# Altium PCB PCB1 - Original(AutoRoute).PcbDoc
Units mil, origin at the board's own origin, x right, y up, seen from the top; angles counter-clockwise.
Board outline 4505.03 x 3000.03 mil, 2 copper layers (Top Layer, Bottom Layer); 44 components, 54 nets, 176 pads, 23 vias.
Unrouted connection lines stored in the file: 2.
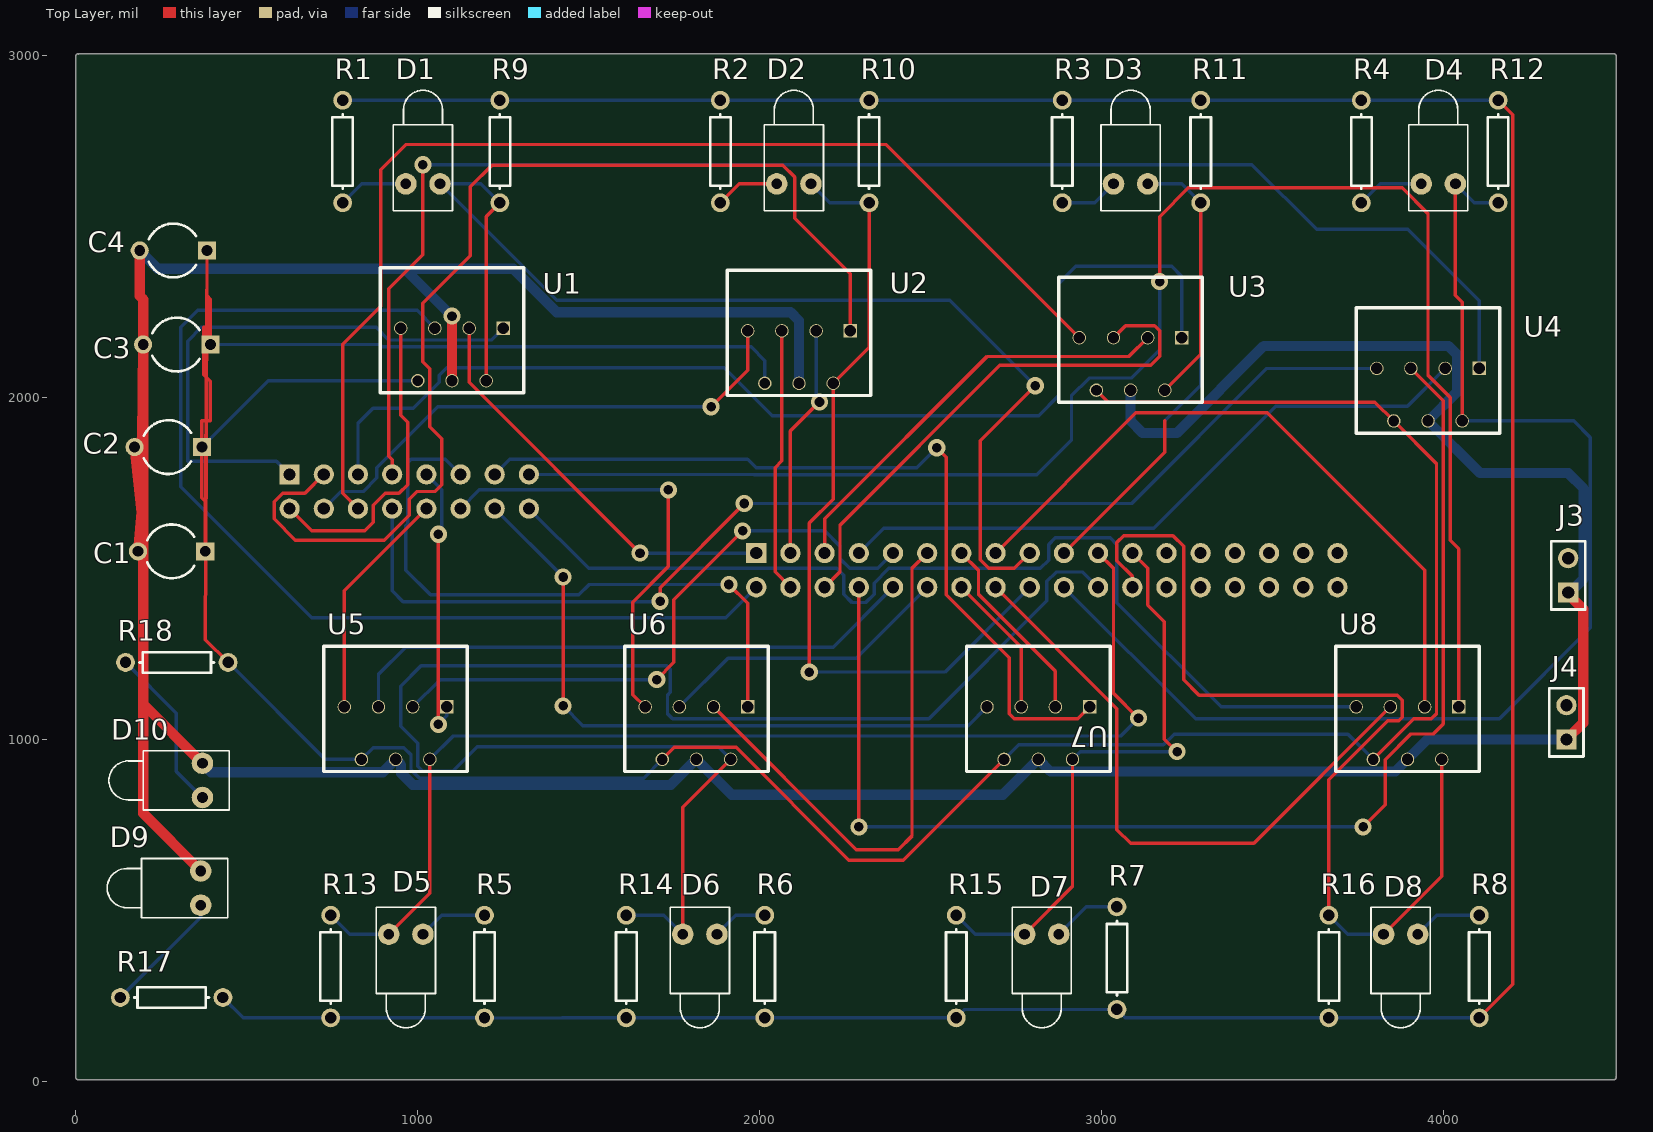
[diagram p0: Top Layer view]
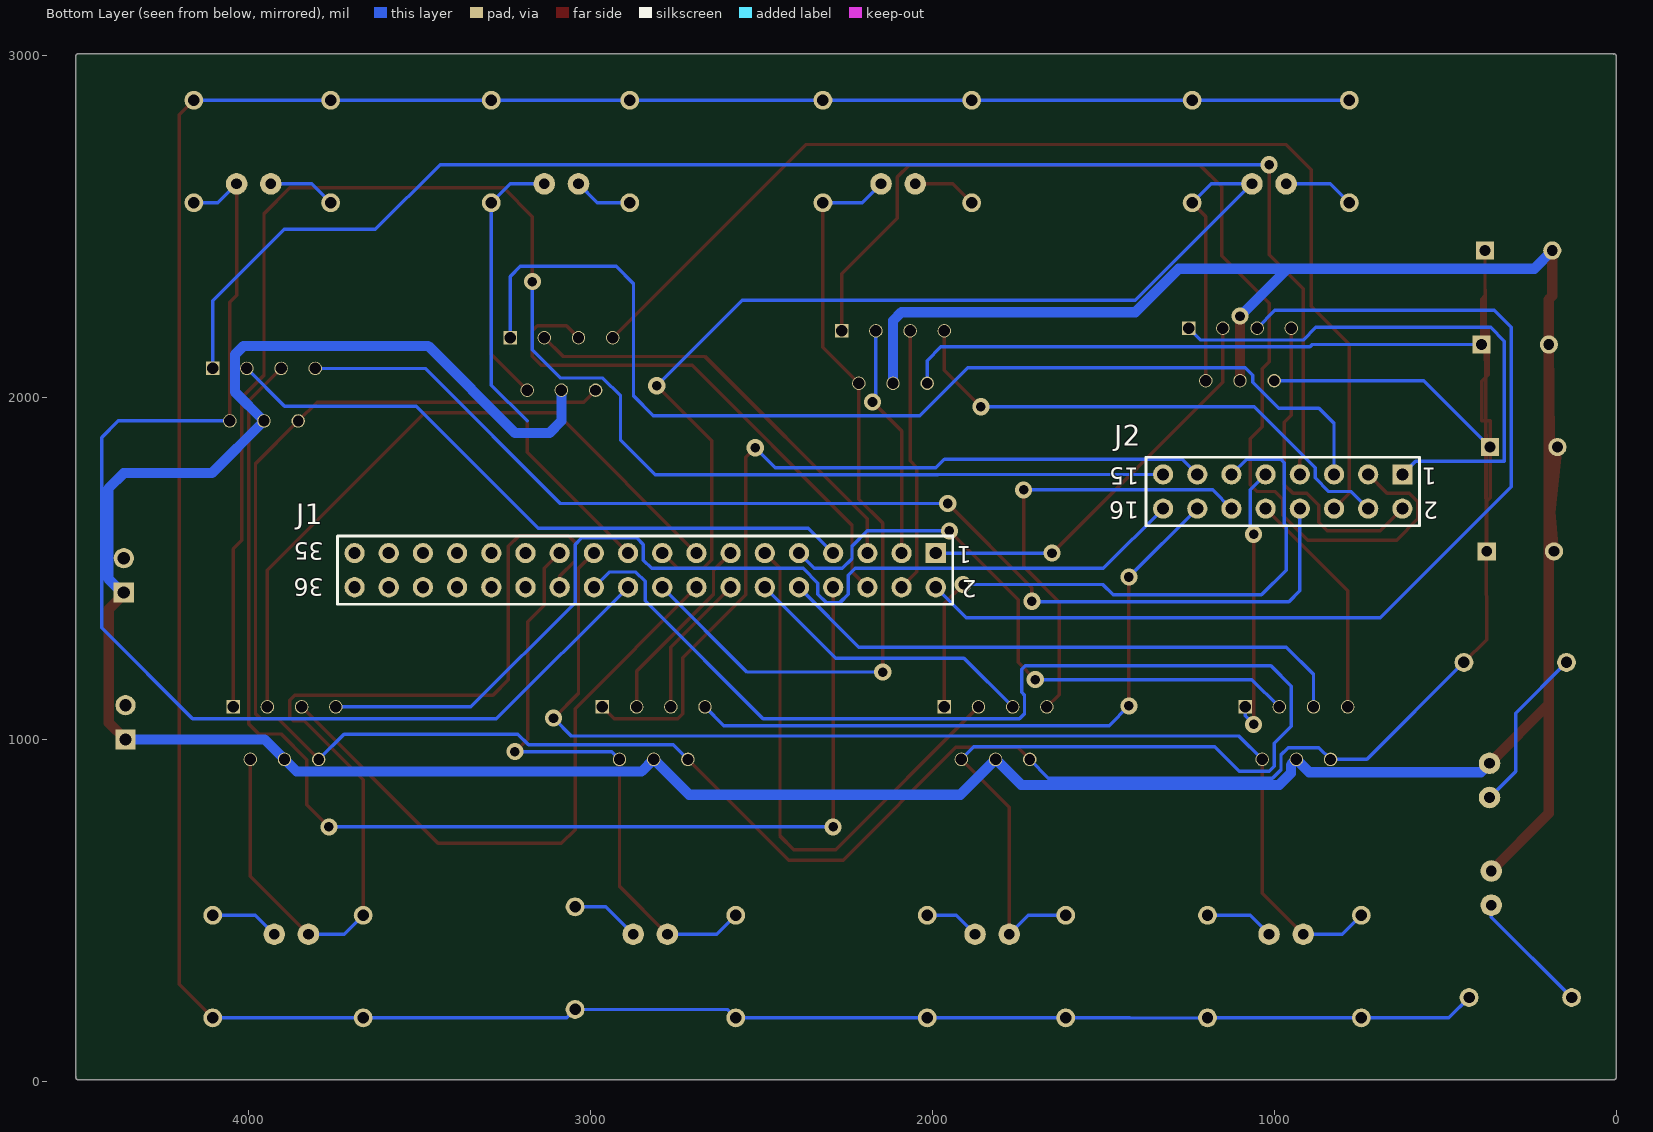
[diagram p1: Bottom Layer view, seen from below]

## Layer stack, top to bottom
Top Solder: solder mask 0.4, Solder Resist, Dk 3.5
Top Layer: signal copper 1.4
Dielectric 1: dielectric 12.6, FR-4, Dk 4.8
Bottom Layer: signal copper 1.4
Bottom Solder: solder mask 0.4, Solder Resist, Dk 3.5

## Board outline
5,4.99 cw(c5,10) -0.01,10 -0.01,3000 cw(c5,3000) 7.5,3004.35 cw(c10,3000) 10,3005.01 4500,3005.01 cw(c4500,3000) 4505.02,3000 4505.02,15 cw(c4500,15) 4504.35,12.5 cw(c4500,10) 4505.02,10 cw(c4500,10) 4500,4.99

## Design rules (kind name [scope] priority, off if disabled: settings)
Clearance [All] p1: gap=10
PolygonConnect [All] p1: connectstyle=Relief reliefconductorwidth=10 reliefentries=4 polygonreliefangle="90 Angle" airgapwidth=10
RoomDefinition Sheet1 [InComponentClass('Sheet1')] p1: confinementstyle=ConfineIn formatcopy=TRUE lockcomponents=FALSE outline -995,-995 1005,-995 1005,5 -995,5
RoutingVias [All] p1: holewidth=28 width=50 viastyle="Through Hole" minholewidth=28 minwidth=50 maxholewidth=28 maxwidth=50
SolderMaskExpansion [All] p1: expansion=4
Width [InNet('No Net')] p1: maxlimit=30 minlimit=30 preferedwidth=30 minimp=50.000000 maximp=50.000000 favimp=50.000000
30 further rules are at their usual default settings.

## Components (designator, comment, footprint, x,y, rotation, side; value= is the part's Value field where it differs from the comment)
C1 "Cap1" CAPR5-4X5 280,1550 r180 top
C2 "Cap1" CAPR5-4X5 270,1855 r180 top
C3 "Cap2" CAPR5-4X5 295,2155 r180 top
C4 "Cap2" CAPR5-4X5 285,2430 r180 top
D1 "RED LED" LED-1#1 1015,2625 r90 top
D2 "RED LED" LED-1#1 2100,2625 r90 top
D3 "RED LED" LED-1#1 3085,2625 r90 top
D4 "RED LED" LED-1#1 3985,2625 r90 top
D5 "RED LED" LED-1#1 965,430 r270 top
D6 "RED LED" LED-1#1 1825,430 r270 top
D7 "RED LED" LED-1#1 2825,430 r270 top
D8 "RED LED" LED-1#1 3875,430 r270 top
D9 "GREEN LED" LED-1#1 365,565 r180 top
D10 "GREEN LED" LED-1#2 370,880 r180 top
J1 "Header 18X2" HDR2X18 1990,1545 r0 bottom
J2 "Header 8X2" HDR2X8 625,1775 r0 bottom
J3 "3.3V PS" HDR1X2 4365,1430 r90 top
J4 "12V PS" HDR1X2 4360,1000 r90 top
R1 "Res2" AXIAL-0.3 780,2719.56 r90 top
R2 "Res2" AXIAL-0.3 1885,2719.56 r90 top
R3 "Res2" AXIAL-0.3 2885,2719.56 r90 top
R4 "Res2" AXIAL-0.3 3760,2719.56 r90 top
R5 "Res2" AXIAL-0.3 1195,335.44 r270 top
R6 "Res2" AXIAL-0.3 2015,335.44 r270 top
R7 "Res2" AXIAL-0.3 3045,360 r270 top
R8 "Res2" AXIAL-0.3 4105,335.44 r270 top
R9 "Res1" AXIAL-0.3 1240,2719.56 r90 top
R10 "Res1" AXIAL-0.3 2320,2719.56 r90 top
R11 "Res1" AXIAL-0.3 3290,2719.56 r90 top
R12 "Res1" AXIAL-0.3 4160,2719.56 r90 top
R13 "Res1" AXIAL-0.3 745,335.44 r270 top
R14 "Res1" AXIAL-0.3 1610,335.44 r270 top
R15 "Res1" AXIAL-0.3 2575,335.44 r270 top
R16 "Res1" AXIAL-0.3 3665,335.44 r270 top
R17 "Res2" AXIAL-0.3 280,245 r0 top
R18 "Res3" AXIAL-0.3 295,1225 r0 top
U1 "TLE 5206-2S" "TLE 5206-2" 1310,2380 r180 top
U2 "TLE 5206-2S" "TLE 5206-2" 2325,2372.17 r180 top
U3 "TLE 5206-2S" "TLE 5206-2" 3295,2352.17 r180 top
U4 "TLE 5206-2S" "TLE 5206-2" 4165,2262.17 r180 top
U5 "TLE 5206-2S" "TLE 5206-2" 1145,1272.17 r180 top
U6 "TLE 5206-2S" "TLE 5206-2" 2025,1272.17 r180 top
U7 "TLE 5206-2S" "TLE 5206-2" 3025,1272.17 r180 top
U8 "TLE 5206-2S" "TLE 5206-2" 4105,1272.17 r180 top

## Footprints (in the part's own frame and the unit in brackets; to place one, negate y for a bottom-side part, rotate by r counter-clockwise, add the part's x,y. Pads: shape width x height; smd on the part's side, far side on the other; paste and mask are expansions set on the pad)
AXIAL-0.3 [mm] "Axial Device, Thru-Hole; 2 Leads; 0.3 in Pin Spacing"
  round 1.4 hole 0.85: 1(-3.81,0) 2(3.81,0)
  silkscreen extent -2.77,-0.76 2.77,0.76
CAPR5-4X5 [mm] "Capacitor; 2 Leads"
  rect 1.35x1.35 hole 0.8: 1(-2.5,0)
  round 1.35 hole 0.8: 2(2.5,0)
  silkscreen extent -1.69,-2 1.82,2
HDR1X2 [mm] "Connector; Header; 2 Position"
  rect 1.5x1.5 hole 0.9: 1(0,0)
  round 1.5 hole 0.9: 2(2.54,0)
  silkscreen extent -1.27,-1.27 3.81,1.27
HDR2X8 [mm] "Connector; Header; 8x2 Position"
  rect 1.5x1.5 hole 0.9: 1(0,0)
  round 1.5 hole 0.9: 2(0,2.54) 3(2.54,0) 4(2.54,2.54) 5(5.08,0) 6(5.08,2.54) 7(7.62,0) 8(7.62,2.54) 9(10.16,0) 10(10.16,2.54) 11(12.7,0) 12(12.7,2.54) 13(15.24,0) 14(15.24,2.54) 15(17.78,0) 16(17.78,2.54)
  silkscreen extent -1.27,-1.27 19.05,3.81
HDR2X18 [mm] "Connector; Header; 18x2 Position"
  rect 1.5x1.5 hole 0.9: 1(0,0)
  round 1.5 hole 0.9: 2(0,2.54) 3(2.54,0) 4(2.54,2.54) 5(5.08,0) 6(5.08,2.54) 7(7.62,0) 8(7.62,2.54) 9(10.16,0) 10(10.16,2.54) 11(12.7,0) 12(12.7,2.54) 13(15.24,0) 14(15.24,2.54) 15(17.78,0) 16(17.78,2.54) 17(20.32,0) 18(20.32,2.54) 19(22.86,0) 20(22.86,2.54) 21(25.4,0) 22(25.4,2.54) 23(27.94,0) 24(27.94,2.54) 25(30.48,0) 26(30.48,2.54) 27(33.02,0) 28(33.02,2.54) 29(35.56,0) 30(35.56,2.54) 31(38.1,0) 32(38.1,2.54) 33(40.64,0) 34(40.64,2.54) 35(43.18,0) 36(43.18,2.54)
  silkscreen extent -1.27,-1.27 44.45,3.81
LED-1#1 [mm] "LED; 2 Leads"
  round 1.6 hole 0.8: 1(0,1.27) 2(0,-1.27)
  silkscreen extent -2,-2.2 6.95,2.2
LED-1#2 [mm] "LED; 2 Leads"
  round 1.6 hole 0.8 mask+0.089: 1(0,1.27)
  round 1.6 hole 0.8: 2(0,-1.27)
  silkscreen extent -2,-2.2 6.95,2.2
"TLE 5206-2" [mm] "H-bridge bent legs"
  rect 1x1 hole 0.85: 1(1.524,4.5)
  round 1 hole 0.85: 2(2.794,8.4) 3(4.064,4.5) 4(5.334,8.4) 5(6.604,4.5) 7(9.144,4.5)
  round 1 hole 0.8: 6(7.874,8.4)
  silkscreen extent 0,0 10.67,9.3

## Part data
C1 C2: library part Cap2, "Capacitor"
C3 C4: "Capacitor"
D1 D2 D3 D4 D5 D6 D7 D8 D9 D10: library part LED1, "Typical RED GaAs LED"
J1: "Header, 18-Pin, Dual row"
J2: "Header, 8-Pin, Dual row"
J3 J4: library part "Header 2", "Header, 2-Pin"
R1 R2 R3 R4 R5 R6 R7 R8 R17 R18: library part Res1, "Resistor"
R9 R10 R11 R12 R13 R14 R15 R16: "Resistor"
U1 U2 U3 U4 U5 U6 U7 U8: "Infineon TLE 5206-2S Hbridge"

## Via types
v1: diameter 50, hole 28, Top Layer to Bottom Layer, 23 vias

## Nets (pads, with @x,y where several pads share a name; then routed paths per layer and width w, separated by ;. In a path a pad name is that pad's centre, name@x,y a point inside that pad or via, vN(x,y) a via of type N, cw(c..) or ccw(c..) an arc to the next point about the centre after c; other vN are vias at no path point)
GND: C1.2 C2.2 C3.2 C4.2 D9.2 D10.2 J3.1 J4.1 U1.4 U2.4 U3.4 U4.4 U5.4 U6.4 U7.4 U8.4 | length 12513.9
  Top Layer w30: C1.2 191.57,1664 ; C4.2 186.57,2297 196.57,2287 C3.2 ; D9.2 196.57,783.43 196.57,1103.43 ; D10.2 196.57,1103.43 ; U1.4 v1(1100,2238) ; J4.1 4409,1049 4409,1381 J3.1@4365,1425 ; 191.57,1664 191.57,1765 192.72,1854.73 193,1876.43 ; 191.57,1664 C2.2 193,1876.43 ; 193,1876.43 C3.2 ; 193,1876.43 196.57,1880 ; 196.57,1103.43 196.57,1880 ; 196.57,1880 C3.2
  Bottom Layer w30: C4.2 239.57,2377 961,2377 ; D10.2 396,904 897.54,904 U5.4 951.16,925.3 951.16,900.62 985,866.77 1740.31,866.77 U6.4 1918.46,838 2711.54,838 U7.4 2850.46,906 3859.54,906 U8.4 3953.54,1000 J4.1 ; v1(1100,2238) 961,2377 ; U2.4 2115,2225 2090.31,2249.69 1406.31,2249.69 1279,2377 961,2377 ; U3.4 3085,1931.46 3120.46,1896 3220,1896 3475,2151 4014,2151 4040,2125 4040,2016.46 U4.4 4107.46,1779 4365,1779 4410,1734 4410,1470 J3.1@4365,1425
H1_EF: D1.2 J1.17 R9.1 U1.2 | length 3469.8
  Top Layer w10: U1.2 1200,2529.56 R9.1 ; J1.17 2745,1500 2670.47,1500 2645.47,1525 2645.47,1873.8 v1(2806,2034.33)
  Bottom Layer w10: R9.1 1184.56,2625 D1.2 1406,2284 2556.33,2284 v1(2806,2034.33)
H1_IN1: J1.1 U1.3 | length 1204.9
  Top Layer w10: U1.3 1150,2045 v1(1650,1545)
  Bottom Layer w10: v1(1650,1545) J1.1
H1_IN2: J1.2 U1.5 | length 3130.5
  Bottom Layer w10: U1.5 997.83,2255 356,2255 306.85,2205.85 306.85,1739.15 690,1356 1901,1356 J1.2
H1_OUT1: J2.1 U1.1 | length 1634.9
  Bottom Layer w10: J2.1 586.58,1813.42 326.85,1813.42 326.85,2164.85 367,2205 878.15,2205 915,2168.15 1215.31,2168.15 U1.1
H1_OUT2: J2.2 U1.7 | length 923.3
  Top Layer w10: J2.2 690,1610 845,1610 870,1635 870,1685 905,1720 945,1720 970,1745 970,1928 950,1948 U1.7
H2_EF: D2.2 J1.18 R10.1 U2.2 | length 2385.7
  Top Layer w10: v1(2145,1197) 2145,1633 2215,1703 U2.2 2320,2146.46 R10.1
  Bottom Layer w10: v1(2145,1197) 2542,1197 J1.18 ; D2.2 2205.44,2569.56 R10.1
H2_IN1: J1.3 U2.3 | length 689.4
  Top Layer w10: J1.3 2090,1902 v1(2175,1987)
  Bottom Layer w10: U2.3 2165,1997 v1(2175,1987)
H2_IN2: J1.4 U2.5 | length 776.9
  Top Layer w10: U2.5 2065,1815 2045,1795 2045,1490 J1.4
H2_OUT1: J2.3 U2.1 | length 3297.5
  Top Layer w10: J2.3 670,1720 605,1720 580,1695 580,1645 642,1583 902,1583 975,1656 975,1703 997,1725 1050,1725 1070,1745 1070,1879 1035,1914 1035,2084 1015,2104 1015,2276 1154,2415 1154,2617 1217,2680 2068,2680 2103,2645 2103,2524 2265,2362 U2.1
H2_OUT2: J2.4 U2.7 | length 1540.3
  Top Layer w10: v1(1858,1973) 1965,2080 U2.7
  Bottom Layer w10: J2.4 775,1725 840,1725 880,1765 880,1795 1058,1973 v1(1858,1973)
H3_EF: D3.2 J1.19 R11.1 U3.2 | length 1959.8
  Top Layer w10: J1.19 3185,1840 3185,1931.46 ; U3.2 3290,2126.46 R11.1
  Bottom Layer w10: D3.2 3234.56,2625 R11.1 3290,2036.46 3185,1931.46
H3_IN1: J1.5 U3.3 | length 1264.5
  Top Layer w10: J1.5 2190,1645 2665,2120 3080,2120 U3.3
H3_IN2: J1.6 U3.5 | length 1570
  Top Layer w10: J1.6 2235,1490 2235,1627 2702.33,2094.33 3143.33,2094.33 3170,2121 3170,2195 3155,2210 3070,2210 U3.5
H3_OUT1: J2.5 U3.1 | length 3261.4
  Bottom Layer w10: J2.5 825,1925 869,1969 987,1969 1063,2045 1063,2065 1085,2087 1897,2087 2037,1947 2816,1947 2874,2005 2874,2333 2925,2384 3205,2384 3235,2354 U3.1
H3_OUT2: J2.6 U3.7 | length 3364.3
  Top Layer w10: J2.6 780,1720 780,2156 891,2267 891,2666 965,2740 2370,2740 U3.7
H4_EF: D4.2 J1.20 R12.1 U4.2 | length 3611.5
  Top Layer w10: D4.2 4035,2299 4055,2279 U4.2
  Bottom Layer w10: J1.20 3275,1060 4164,1060 4430,1326 4430,1883 4381.54,1931.46 U4.2 ; D4.2 4090.44,2569.56 R12.1
H4_IN1: J1.7 U4.3 | length 1938.7
  Bottom Layer w10: J1.7 2363.08,1618.08 3153.08,1618.08 3510,1975 3895,1975 U4.3
H4_IN2: J1.8 U4.5 | length 3691.9
  Top Layer w10: v1(2290,744) J1.8 ; v1(3765,744) 3830,809 3830,941 3904.69,1015.69 3970.37,1015.69 3999.69,1045 3999.69,1990.32 U4.5
  Bottom Layer w10: v1(2290,744) v1(3765,744)
H4_OUT1: J2.7 U4.1 | length 4404.4
  Top Layer w10: J2.7 925,1818 915,1828 915,2318 1015,2418 v1(1015,2681)
  Bottom Layer w10: v1(1015,2681) 3440,2681 3629,2492 3896,2492 4105,2283 U4.1
H4_OUT2: J2.8 U4.7 | length 3439.5
  Top Layer w10: v1(1709,1404) 1709,1444 v1(1955,1690)
  Bottom Layer w10: J2.8 925,1434.5 956.58,1402.92 1707.92,1402.92 v1(1709,1404) ; v1(1955,1690) 3088,1690 3483,2085 U4.7
H5_EF: D5.2 J1.21 R13.1 U5.2 | length 3408.9
  Top Layer w10: D5.2 1035,550 U5.2 ; J1.21 3035,1500 3035,1135 v1(3108,1062)
  Bottom Layer w10: R13.1 800.44,430 D5.2 ; U5.2 1103.54,1010 3056,1010 v1(3108,1062)
H5_IN1: J1.9 U5.3 | length 1811
  Top Layer w10: v1(1699,1175) 1749,1225 1749,1409 v1(1950,1610)
  Bottom Layer w10: U5.3 1065,1175 v1(1699,1175) ; v1(1950,1610) 2190,1610 2235,1565 2235,1529 2263.53,1500.47 2345.47,1500.47 J1.9
H5_IN2: J1.10 U5.5 | length 1705.6
  Bottom Layer w10: U5.5 885,1190 965,1270 2215,1270 J1.10
H5_OUT1: J2.9 U5.1 | length 815.1
  Top Layer w10: v1(1060,1044) v1(1060,1600)
  Bottom Layer w10: J2.9 1070,1730 1070,1610 v1(1060,1600) ; v1(1060,1044) 1085,1069 U5.1
H5_OUT2: J2.10 U5.7 | length 679.4
  Top Layer w10: U5.7 785,1435 J2.10
H6_EF: D6.2 J1.22 R14.1 U6.2 | length 4425
  Top Layer w10: D6.2 1775,801.46 U6.2
  Bottom Layer w10: R14.1 1719.56,485.44 D6.2 ; U6.2 1878.46,978 1173.23,978 1102,906.77 1015,906.77 1000,921.77 1000,988.63 950,1038.63 950,1156 1009.25,1215.25 1728.75,1215.25 1739,1205 1739,1138.37 1730.31,1129.69 1730.31,1075 1745,1060.31 2495.31,1060.31 2840,1405 2840,1462 2867.53,1489.53 2945.47,1489.53 J1.22
H6_IN1: J1.11 U6.3 | length 1616.3
  Top Layer w10: U6.3 2283,677 2405,677 2445.47,717.47 2445.47,1500.47 J1.11
H6_IN2: J1.12 U6.5 | length 870
  Bottom Layer w10: U6.5 1907.33,1237.33 2282.33,1237.33 J1.12
H6_OUT1: J2.11 U6.1 | length 1862.3
  Top Layer w10: v1(1910,1453) 1965,1398 U6.1
  Bottom Layer w10: J2.11 1080.47,1819.53 980,1819.53 970,1809.53 970,1630 965,1625 965,1495 1037.08,1422.92 1471.36,1422.92 1501.44,1453 v1(1910,1453)
H6_OUT2: J2.12 U6.7 | length 1323.8
  Top Layer w10: U6.7 1629,1131 1629,1401.71 1733,1505.71 v1(1733,1730)
  Bottom Layer w10: J2.12 1180,1730 v1(1733,1730)
H7_EF: D7.2 J1.23 R15.1 U7.2 | length 1743
  Top Layer w10: D7.2 2915,570 U7.2 ; J1.23 3135,1500 3135,1393 3184,1344 3184,1001 v1(3221,964)
  Bottom Layer w10: R15.1 2630.44,430 D7.2 ; U7.2 2937.54,964 v1(3221,964)
H7_IN1: J1.13 U7.3 | length 563.9
  Top Layer w10: J1.13 2640,1495 2640,1425 2865,1200 U7.3
H7_IN2: J1.14 U7.5 | length 422.5
  Top Layer w10: J1.14 2765,1270 U7.5
H7_OUT1: J2.13 U7.1 | length 2468
  Top Layer w10: v1(2518,1853) 2545.47,1825.53 2545.47,1423.53 2730,1239 2730,1075 2745,1060 2930,1060 U7.1
  Bottom Layer w10: J2.13 1269.53,1819.53 1964.47,1819.53 1990,1794 2459,1794 v1(2518,1853)
H7_OUT2: J2.14 U7.7 | length 1946.6
  Top Layer w10: v1(1425,1098) v1(1425,1475)
  Bottom Layer w10: J2.14 v1(1425,1475) ; v1(1425,1098) 1483,1040 2610,1040 U7.7
H8_EF: D8.2 J1.24 R16.1 U8.2 | length 2923
  Top Layer w10: J1.24 3090,1478 3045,1523 3045,1576 3065,1596 3209,1596 3240,1565 3240,1174.69 3285,1129.69 3865.31,1129.69 3880,1115 3880,1065 3869.74,1054.74 3837.74,1054.74 3665,882 R16.1 ; D8.2 3995,600 U8.2
  Bottom Layer w10: R16.1 3720.44,430 D8.2
H8_IN1: J1.15 U8.3 | length 2015.4
  Top Layer w10: J1.15 3100,1955 3485,1955 3945,1495 U8.3
H8_IN2: J1.16 U8.5 | length 1837.9
  Top Layer w10: J1.16 3045,1090 3045,736 3085,696 3446,696 U8.5
H8_OUT1: J2.15 U8.1 | length 4793
  Top Layer w10: v1(3170,2339) 3170,2529 3254,2613 3880,2613 3955,2538 3955,2065 4020,2000 4020,1582 4045,1557 U8.1
  Bottom Layer w10: J2.15 1984.19,1773.81 2810.81,1773.81 2912,1875 2912,2005 2964,2057 3087,2057 3170,2140 v1(3170,2339)
H8_OUT2: J2.16 U8.7 | length 2995.2
  Bottom Layer w10: J2.16 1500,1500 2225.94,1500 2245.47,1480.47 2245.47,1425 2270,1400.47 2310,1400.47 2334.53,1425 2334.53,1457.26 2377.26,1500 2821,1500 2845,1524 2845,1570 2865,1590 3025,1590 3045,1570 3045,1400 3350,1095 U8.7
NetD1_1: D1.1 R1.1 | length 208
  Bottom Layer w10: R1.1 835.44,2625 D1.1
NetD2_1: D2.1 R2.1 | length 188
  Top Layer w10: R2.1 1940.44,2625 D2.1
NetD3_1: D3.1 R3.1 | length 173
  Bottom Layer w10: R3.1 2979.56,2569.56 D3.1
NetD4_1: D4.1 R4.1 | length 198
  Bottom Layer w10: R4.1 3815.44,2625 D4.1
NetD5_1: D5.1 R5.1 | length 203
  Bottom Layer w10: D5.1 1070.44,485.44 R5.1
NetD6_1: D6.1 R6.1 | length 163
  Bottom Layer w10: D6.1 1930.44,485.44 R6.1
NetD7_1: D7.1 R7.1 | length 203.1
  Bottom Layer w10: D7.1 2955,510 R7.1
NetD8_1: D8.1 R8.1 | length 203
  Bottom Layer w10: D8.1 3980.44,485.44 R8.1
NetD9_1: D9.1 R17.1 | length 367.3
  Bottom Layer w10: R17.1 365,480 D9.1
NetD10_1: D10.1 R18.1 | length 488.2
  Bottom Layer w10: R18.1 294,1076 294,906 D10.1
"VCC 3.3V": R1.2 R2.2 R3.2 R4.2 R5.2 R6.2 R7.2 R8.2 R9.2 R10.2 R11.2 R12.2 R13.2 R14.2 R15.2 R16.2 R17.2 | length 9843.5
  Top Layer w10: R8.2 4203,283.44 4203,2826.56 R12.2
  Bottom Layer w10: R17.2 489.56,185.44 R13.2 R5.2 1195,185 1422,185 1422.44,185.44 R14.2 R6.2 R15.2 2599.56,210 R7.2 3069.56,185.44 R16.2 R8.2 ; R1.2 972.56,2869.56 973,2870 1202.56,2870 1203,2869.56 R9.2 R2.2 R10.2 R3.2 R11.2 R4.2 R12.2
VCC_3.3V: J3.2
VCC_12V: C1.1 C2.1 C3.1 C4.1 J4.2 R18.2 U1.6 U2.6 U3.6 U4.6 U5.6 U6.6 U7.6 U8.6 | length 11480.8
  Top Layer w10: C3.1 393.43,2205 ; R18.2 378.43,1291.57 379.56,1549.99 380.9,1854.95 381.24,1932.43 ; U6.6 1750.54,977 1931,977 2261,647 2420.54,647 U7.6 ; U3.6 3019.69,1986.77 3799.69,1986.77 U4.6 3979.69,1806.77 3979.69,1074.69 3965,1060 3913.54,1060 U8.6 ; 380.6,1932.43 381.32,2059.11 ; 380.6,1932.43 380.16,1854.93 C1.1 378.43,1697 368.43,1707 C2.1 368.43,1932.43 380.6,1932.43 ; 380.6,1932.43 381.24,1932.43 ; 381.24,1932.43 381.79,2058.63 ; 381.24,1932.43 393.43,1932.43 393.43,2047 381.79,2058.63 ; 381.32,2059.11 381.79,2058.63 ; 381.32,2059.11 373.43,2067 373.43,2205 382.15,2205 ; 381.32,2059.11 381.86,2155.07 382.15,2205 ; 381.79,2058.63 382.22,2155.05 382.44,2205 ; 382.15,2205 382.44,2205 ; 382.15,2205 C4.1 ; 382.44,2205 393.43,2205 ; 382.44,2205 C4.1 ; C4.1 383.43,2297 393.43,2287 393.43,2205
  Bottom Layer w10: C2.1 562.72,2049.29 U1.6 ; C3.1 888.46,2155 895.31,2148.15 1974.85,2148.15 2015,2108 U2.6 ; R18.2 728.54,941.46 U5.6 869.69,976.14 958.54,976.14 980,954.69 980,911.77 1005,886.77 1660.31,886.77 U6.6 ; U7.6 2757.54,984 3181.14,984 3212.72,1015.58 3720.87,1015.58 U8.6
pads on no net: J1.25 J1.26 J1.27 J1.28 J1.29 J1.30 J1.31 J1.32 J1.33 J1.34 J1.35 J1.36

## Silkscreen, mask and mechanical layers (free items; w line width, h text height)
Mechanical 1:
  lines w10: 5,2900 10,2905 ; 5,3000 5,10 4500,10 ; 10,3000 4500,3000 4500,15 ; 3975,10 3980,15

## Text inside footprints (layer, text, board x,y; h text height)
J1: Bottom Overlay "36" at 3780,1470 h50 r180; Bottom Overlay "35" at 3780,1575 h50 r180; Bottom Overlay "1" at 1885,1565 h50 r180; Bottom Overlay "2" at 1870,1465 h50 r180
J2: Bottom Overlay "2" at 520,1695 h50 r180; Bottom Overlay "1" at 525,1795 h50 r180; Bottom Overlay "15" at 1395,1795 h50 r180; Bottom Overlay "16" at 1395,1695 h50 r180